# Altium PCB PCB1.PcbDoc (part 2 of 2)
Units mm, origin at the board's own origin, x right, y up, seen from the top; angles counter-clockwise.
Board outline 93.92 x 89.66 mm, 2 copper layers (Top Layer, Bottom Layer); 110 components, 45 nets, 506 pads, 98 vias.
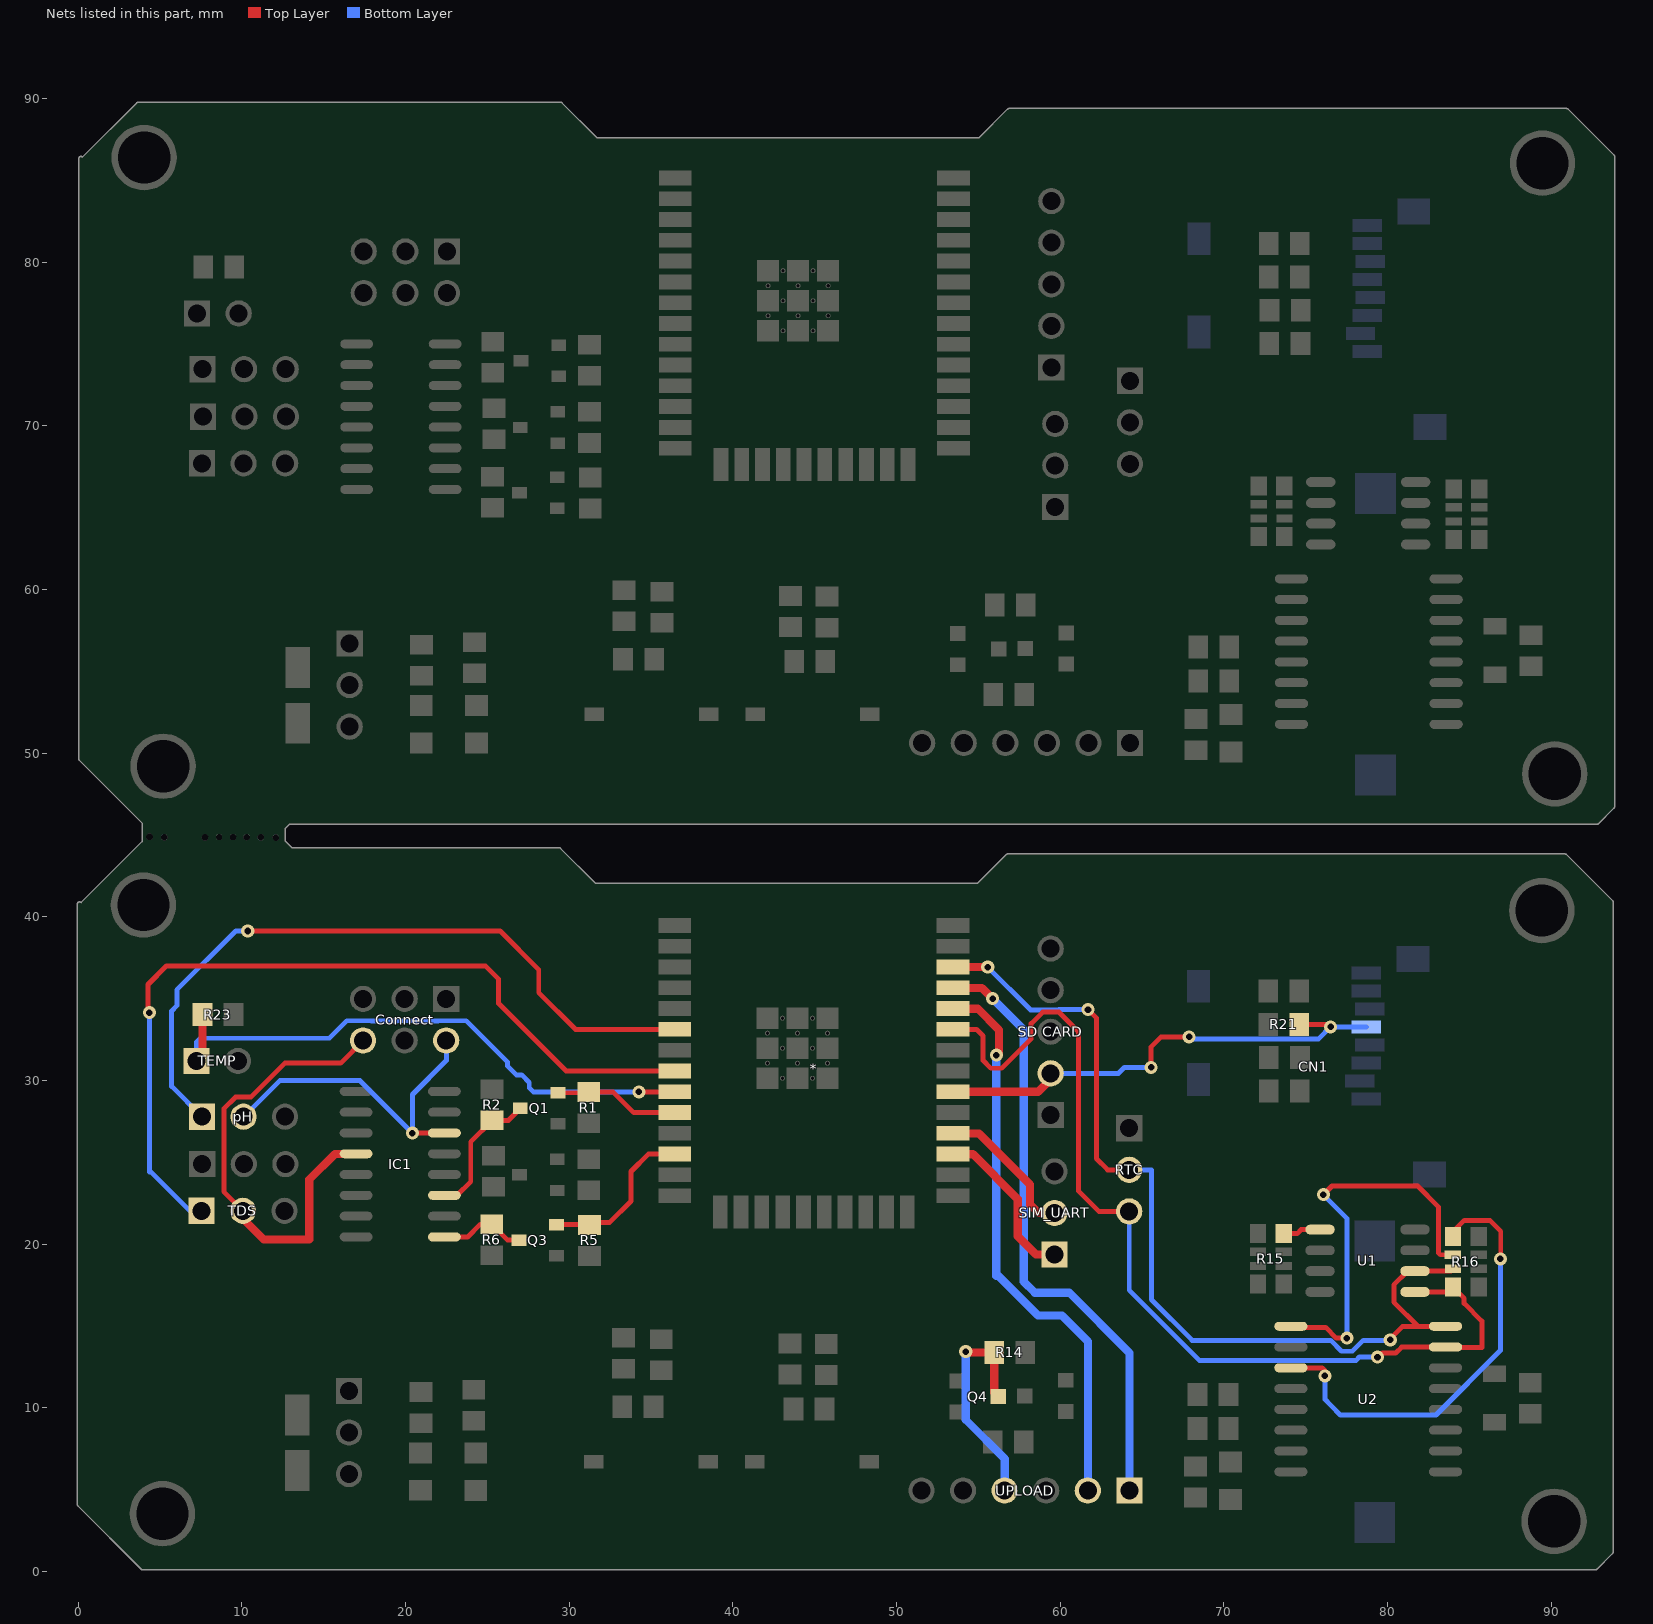
[diagram p2: the nets of this part, all layers, seen from the top]

## Via types
v1: diameter 0.8, hole 0.4, Top Layer to Bottom Layer, 92 vias
v2: diameter 1.27, hole 1.27, Top Layer to Bottom Layer, 4 vias
v3: diameter 1.27, hole 0.711, Top Layer to Bottom Layer, 2 vias

## Nets (pads, with @x,y where several pads share a name; then routed paths per layer and width w, separated by ;. In a path a pad name is that pad's centre, name@x,y a point inside that pad or via, vN(x,y) a via of type N, cw(c..) or ccw(c..) an arc to the next point about the centre after c; other vN are vias at no path point) (continued)
NetR15_4: R15.4@73.661,20.651 U1.1@75.879,20.891 | length 2.3
  Top Layer w0.3: R15.4@73.672,20.645 74.475,20.645 74.715,20.885 U1.1@75.89,20.885
NetR16_1: R16.1@83.999,20.469 U2.3@74.094,12.441 | length 27.7
  Top Layer w0.3: U2.3@74.105,12.435 75.995,12.435 76.18,12.25 v1(76.18,11.95) ; R16.1@84.01,20.463 84.01,20.77 84.687,21.447 86.252,21.447 86.92,20.779 86.92,19.12 v1(86.9,19.1)
  Bottom Layer w0.3: v1(76.18,11.95) 76.18,10.51 76.54,10.15 76.535,10.145 77.12,9.56 82.96,9.56 86.9,13.5 v1(86.9,19.1)
NetR16_2: R16.2@83.998,19.354 U2.1@74.094,14.981 | length 24.6
  Top Layer w0.3: U2.1@74.105,14.975 74.17,14.91 76.22,14.91 76.87,14.26 v1(77.52,14.26) ; v1(76.08,23.02) 76.61,23.55 81.84,23.55 83.11,22.28 83.11,21.219 83.106,21.215 83.106,19.468 83.226,19.348 R16.2@84.008,19.348
  Bottom Layer w0.3: v1(76.08,23.02) 77.52,21.58 v1(77.52,14.26)
pH_ADC: *.6@36.447,33.121 pH.1@7.559,27.786 | length 43.9
  Top Layer w0.3: v1(10.36,39.13) 25.78,39.13 28.14,36.77 28.14,35.37 30.395,33.115 *.6@36.458,33.115
  Bottom Layer w0.3: pH.1@7.57,27.78 5.708,29.642 5.708,34.244 6.036,34.572 6.036,35.536 9.63,39.13 v1(10.36,39.13)
pH_ON: *.10@36.447,28.041 Q1.2@29.319,29.256 R1.1@31.199,29.291 | length 7.7
  Top Layer w0.3: Q1.2@29.33,29.25 31.174,29.25 31.209,29.286 32.694,29.286 33.944,28.035 *.10@36.458,28.035
pH_ON_5V: IC1.11@22.379,22.981 Q1.3@27.019,28.306 R2.1@25.29,27.56 | length 8.3
  Top Layer w0.3: IC1.11@22.39,22.975 23.145,22.975 23.99,23.82 23.99,26.244 25.301,27.554 26.284,27.554 Q1.3@27.03,28.3
pH_POW: Connect.6@22.489,32.446 IC1.14@22.379,26.791 pH.2@10.099,27.786 | length 21
  Top Layer w0.3: v1(20.425,26.785) IC1.14@22.39,26.785
  Bottom Layer w0.3: pH.2@10.11,27.78 12.32,29.99 17.22,29.99 v1(20.425,26.785) 20.425,29.145 22.5,31.22 Connect.6@22.5,32.44
RTS: Q4.2@56.209,10.686 R14.2@55.965,13.387 UPLOAD.4@56.609,4.946 | length 14
  Top Layer w0.5: v1(54.23,13.43) 54.279,13.381 55.976,13.381 55.976,10.924 Q4.2@56.22,10.68
  Bottom Layer w0.5: v1(54.23,13.43) 54.23,9.27 56.62,6.88 UPLOAD.4@56.62,4.94
RXD0: *.34@53.447,34.391 UPLOAD.2@61.689,4.946 | length 34.9
  Top Layer w0.5: *.34@53.458,34.385 54.965,34.385 56.27,33.08 56.27,31.72 v1(56.1,31.55)
  Bottom Layer w0.5: v1(56.1,31.55) 56.1,18.05 56.165,18.115 ; 56.18,18.13 56.165,18.115 ; UPLOAD.2@61.7,4.94 61.7,14.05 60.12,15.63 58.65,15.63 56.165,18.115
SCK: "SD CARD.2"@59.419,30.436 *.30@53.447,29.311 CN1.5@78.71,33.27 R21.1@74.606,33.431 | length 30.3
  Top Layer w0.3: v1(65.56,30.8) 65.56,32.06 66.165,32.665 v1(67.875,32.665) ; R21.1@74.606,33.431 76.359,33.431 v1(76.52,33.27)
  Top Layer w0.5: *.30@53.458,29.305 58.655,29.305 59.57,30.22 59.215,30.575
  Bottom Layer w0.3: 59.419,30.436 63.566,30.436 63.93,30.8 v1(65.56,30.8) ; v1(67.875,32.665) 68,32.54 75.79,32.54 v1(76.52,33.27) CN1.5@78.71,33.27
SCL: *.36@53.447,36.931 R16.3@83.999,18.486 RTC.2@64.22,24.54 U1.6@81.679,18.351 U2.16@83.544,14.981 | length 57.8
  Top Layer w0.3: v1(61.7,34.33) 62.21,33.82 62.21,25.23 62.9,24.54 RTC.2@64.22,24.54 ; v1(80.17,14.15) 80.17,14.22 80.925,14.975 81.86,14.975 ; U2.16@83.555,14.975 81.86,14.975 ; R16.3@84.01,18.48 83.879,18.349 81.69,18.349 81.69,18.345 81.225,18.345 80.386,17.506 80.386,16.449 81.86,14.975
  Top Layer w0.5: *.36@53.458,36.925 v1(55.575,36.925)
  Bottom Layer w0.3: v1(55.575,36.925) 58.188,34.312 59.918,34.312 59.936,34.33 v1(61.7,34.33) v1@61.915,34.33 ; RTC.2@64.22,24.54 65.57,24.54 65.57,16.613 68.064,14.12 76.523,14.12 77.187,13.456 77.853,13.456 78.517,14.12 80.14,14.12 v1(80.17,14.15) 80.17,13.961 v1@80.149,13.94
SDA: *.33@53.447,33.121 R16.4@83.999,17.37 RTC.3@64.22,22 U1.5@81.679,17.081 U2.15@83.544,13.711 | length 60.7
  Top Layer w0.3: *.33@53.458,33.115 54.895,33.115 55.296,32.714 55.296,31.217 55.767,30.746 56.433,30.746 58.226,32.539 58.226,33.469 58.931,34.174 59.929,34.174 61.11,32.993 61.11,23.25 62.36,22 RTC.3@64.22,22 ; v1(79.39,13.1) 79.44,13.1 79.686,13.346 80.503,13.346 80.862,13.705 83.555,13.705 83.58,13.68 85.77,13.68 85.77,15.291 84.681,16.381 84.681,16.694 84.01,17.365 83.72,17.075 U1.5@81.69,17.075
  Bottom Layer w0.3: RTC.3@64.22,22 64.22,17.18 68.498,12.902 78.082,12.902 78.28,13.1 v1(79.39,13.1) v1@79.39,13.17
TDS_ADC: *.8@36.447,30.581 TDS.1@7.529,22.036 | length 51.9
  Top Layer w0.3: v1(4.35,34.14) 4.265,34.225 4.265,35.865 5.4,37 24.88,37 25.69,36.19 25.69,34.7 29.815,30.575 *.8@36.458,30.575
  Bottom Layer w0.3: v1(4.35,34.14) 4.35,24.39 4.405,24.445 6.82,22.03 TDS.1@7.54,22.03
TDS_ON: *.12@36.447,25.501 Q3.2@29.229,21.196 R5.1@31.249,21.171 | length 10.1
  Top Layer w0.3: Q3.2@29.24,21.19 31.235,21.19 31.259,21.166 31.566,21.166 31.71,21.31 32.46,21.31 33.78,22.63 33.78,24.44 34.835,25.495 *.12@36.458,25.495
TDS_ON_5V: IC1.9@22.379,20.441 Q3.3@26.929,20.246 R6.1@25.269,21.211 | length 5.3
  Top Layer w0.3: IC1.9@22.39,20.435 23.795,20.435 24.566,21.206 25.279,21.206 26.245,20.24 Q3.3@26.94,20.24
TDS_POW: Connect.4@17.409,32.446 IC1.4@16.979,25.521 TDS.2@10.069,22.036 | length 29.2
  Top Layer w0.3: TDS.2@10.08,22.03 8.906,23.204 8.906,28.279 9.611,28.984 10.554,28.984 12.63,31.06 16.04,31.06 Connect.4@17.42,32.44
  Top Layer w0.5: TDS.2@10.08,22.03 10.08,21.55 11.34,20.29 14.12,20.29 14.12,23.95 15.685,25.515 IC1.4@16.99,25.515
Temp_ADC: *.9@36.447,29.311 R23.1@7.594,34.019 TEMP.1@7.229,31.196 | length 36
  Top Layer w0.3: v1(34.265,29.305) *.9@36.458,29.305
  Top Layer w0.5: TEMP.1@7.229,31.196 7.594,31.561 R23.1@7.594,34.019
  Bottom Layer w0.3: TEMP.1@7.24,31.19 7.24,32.35 7.47,32.58 15.35,32.58 16.42,33.65 17.908,33.65 17.914,33.644 19.445,33.644 19.451,33.65 20.448,33.65 20.454,33.644 21.985,33.644 21.991,33.65 23.71,33.65 26.24,31.12 26.24,30.87 26.766,30.344 27.093,30.344 27.564,29.873 27.564,29.546 27.805,29.305 v1(34.265,29.305)
TXD0: *.35@53.447,35.661 UPLOAD.1@64.229,4.946 | length 37.4
  Top Layer w0.5: *.35@53.458,35.655 55.215,35.655 v1(55.87,35)
  Bottom Layer w0.5: v1(55.87,35) 57.77,33.1 57.77,17.71 58.45,17.03 60.56,17.03 64.24,13.35 UPLOAD.1@64.24,4.94
U2_RX: *.27@53.447,25.501 SIM_UART.1@59.659,19.366 | length 10.1
  Top Layer w0.5: *.27@53.458,25.495 54.665,25.495 57.406,22.754 57.406,20.484 58.53,19.36 SIM_UART.1@59.67,19.36
U2_TX: *.28@53.447,26.771 SIM_UART.2@59.659,21.906 | length 8.9
  Top Layer w0.5: *.28@53.458,26.765 55.035,26.765 58.16,23.64 58.16,22.43 58.69,21.9 SIM_UART.2@59.67,21.9
pads on no net: "SD CARD.1"@59.459,73.566 "SD CARD.2"@59.459,76.106 "SD CARD.3"@59.459,78.646 "SD CARD.4"@59.459,81.186 "SD CARD.5"@59.459,83.726 *.1@36.487,85.141 *.2@36.487,83.871 *.3@36.487,82.601 *.4 *.5 *.6@36.487,78.791 *.7@36.487,77.521 *.8@36.487,76.251 *.9@36.487,74.981 *.10@36.487,73.711 *.11@36.487,72.441 *.12@36.487,71.171 *.13 *.14 *.15@39.272,67.631 *.16 *.17 *.18 *.19 *.20 *.21 *.22 *.23 *.24@50.702,67.631 *.25@53.487,68.631 *.26 *.27@53.487,71.171 *.28@53.487,72.441 *.29@53.487,73.711 *.30@53.487,74.981 *.31@53.487,76.251 *.32 *.33@53.487,78.791 *.34@53.487,80.061 *.35@53.487,81.331 *.36@53.487,82.601 *.37@53.487,83.871 *.38@53.487,85.141 *.39 BOOT.1@41.369,52.376 BOOT.2@48.369,52.376 BT3.1@79.259,65.856 BT3.2@79.259,48.656 C1.1@13.419,55.226 C1.2@13.419,51.826 C2.1@45.645,55.599 C2.2@43.745,55.599 C3.1@33.294,55.732 C3.2@35.194,55.732 C4.1@68.429,56.476 C4.2@70.329,56.476 C5.1@68.429,54.416 C5.2@70.329,54.416 CN1.1 CN1.2@78.35,75.64 CN1.3@78.75,76.74 CN1.4@78.95,77.84 CN1.5@78.75,78.94 CN1.6@78.95,80.04 CN1.7@78.75,81.14 CN1.8 CN1.MH1 CN1.MH2 CN1.MH3 CN1.MH4 Connect.1@22.529,80.656 Connect.2@19.989,80.656 Connect.3@17.449,80.656 Connect.4@17.449,78.116 Connect.5@19.989,78.116 Connect.6@22.529,78.116 D1.1@86.579,54.791 D1.2@86.579,57.741 DO.1@7.619,70.556 DO.2@10.159,70.556 DO.3@12.699,70.556 EN.1@38.539,52.376 EN.2@31.539,52.376 IC1.1@17.019,75.001 IC1.2 IC1.3@17.019,72.461 IC1.4@17.019,71.191 IC1.5 IC1.6@17.019,68.651 IC1.7@17.019,67.381 IC1.8@17.019,66.111 IC1.9@22.419,66.111 IC1.10@22.419,67.381 IC1.11@22.419,68.651 IC1.12 IC1.13@22.419,71.191 IC1.14@22.419,72.461 IC1.15@22.419,73.731 IC1.16@22.419,75.001 L1.1@24.329,52.902 L1.2@24.329,50.616 L2.1@20.959,52.912 L2.2@20.959,50.626 L3.1@70.439,50.07 L3.2@70.439,52.356 pH.1@7.599,73.456 pH.2@10.139,73.456 pH.3@12.679,73.456 POW.1@16.589,56.696 POW.2@16.589,54.156 POW.3@16.589,51.616 Q1.1@29.359,73.026 Q1.2@29.359,74.926 Q1.3@27.059,73.976 Q2.1@29.309,68.946 Q2.2@29.309,70.846 Q2.3@27.009,69.896 Q3.1@29.269,64.966 Q3.2@29.269,66.866 Q3.3@26.969,65.916 Q4.1@53.749,57.306 Q4.2@56.249,56.356 Q4.3@53.749,55.406 Q5.1@60.379,55.446 Q5.2@57.879,56.396 Q5.3@60.379,57.346 R1.1@31.239,74.961 R1.2@31.239,73.061 R2.1@25.33,73.23 R2.2@25.33,75.13 R3.1@31.239,70.851 R3.2@31.239,68.951 R4.1@25.41,69.18 R4.2@25.41,71.08 R5.1@31.289,66.841 R5.2@31.289,64.941 R6.1@25.309,66.881 R6.2@25.309,64.981 R7.1@35.669,59.861 R7.2@35.669,57.961 R8.1@43.529,59.601 R8.2@43.529,57.701 R9.1@45.75,57.67 R9.2@45.75,59.57 R10.1@33.35,58.05 R10.2@33.35,59.95 R11.1@24.209,56.771 R11.2@24.209,54.871 R12.1@20.979,56.631 R12.2@20.979,54.731 R13.1@57.815,53.577 R13.2@55.915,53.577 R14.1@57.905,59.057 R14.2@56.005,59.057 R15.1 R15.2@73.703,64.337 R15.3@73.701,65.205 R15.4@73.701,66.321 R15.5@72.127,66.321 R15.6@72.125,65.205 R15.7@72.125,64.337 R15.8@72.127,63.222 R16.1@84.039,66.139 R16.2@84.038,65.024 R16.3@84.039,64.156 R16.4@84.039,63.04 R16.5@85.614,63.04 R16.6@85.616,64.156 R16.7@85.616,65.024 R16.8@85.614,66.139 R17.1@88.759,57.206 R17.2@88.759,55.306 R18.1@68.309,50.186 R18.2@68.309,52.086 R19.1@74.686,75.031 R19.2@72.786,75.031 R20.1@74.69,77.06 R20.2@72.79,77.06 R21.1@74.646,79.101 R21.2@72.746,79.101 R22.1@74.646,81.131 R22.2@72.746,81.131 R23.1@7.634,79.689 R23.2@9.534,79.689 RTC.1@64.26,72.75 RTC.2@64.26,70.21 RTC.3@64.26,67.67 SIM_UART.1@59.699,65.036 SIM_UART.2@59.699,67.576 SIM_UART.3@59.699,70.116 TDS.1@7.569,67.706 TDS.2@10.109,67.706 TDS.3@12.649,67.706 TEMP.1@7.269,76.866 TEMP.2@9.809,76.866 U1.1@75.919,66.561 U1.2@75.919,65.291 U1.3@75.919,64.021 U1.4@75.919,62.751 U1.5@81.719,62.751 U1.6@81.719,64.021 U1.7@81.719,65.291 U1.8@81.719,66.561 U2.1@74.134,60.651 U2.2@74.134,59.381 U2.3@74.134,58.111 U2.4 U2.5@74.134,55.571 U2.6@74.134,54.301 U2.7@74.134,53.031 U2.8@74.134,51.761 U2.9@83.584,51.761 U2.10@83.584,53.031 U2.11@83.584,54.301 U2.12@83.584,55.571 U2.13@83.584,56.841 U2.14@83.584,58.111 U2.15@83.584,59.381 U2.16@83.584,60.651 UPLOAD.1@64.269,50.616 UPLOAD.2@61.729,50.616 UPLOAD.3@59.189,50.616 UPLOAD.4@56.649,50.616 UPLOAD.5@54.109,50.616 UPLOAD.6
copper on no net: | length 1572.4
  Top Layer w0.3: v1(4.39,79.81) 4.305,79.895 4.305,81.535 5.44,82.67 24.92,82.67 25.73,81.86 25.73,80.37 29.855,76.245 36.498,76.245 ; v1(6.92,83.86) 25.26,83.86 27.05,82.07 27.05,80.51 30.044,77.515 36.498,77.515 ; 10.12,67.7 8.946,68.874 8.946,73.949 9.651,74.654 10.594,74.654 12.67,76.73 16.08,76.73 17.46,78.11 ; 10.17,70.55 11.29,71.67 11.29,72.823 11.486,73.019 11.486,73.949 13.627,76.09 19.29,76.09 ; v1(10.4,84.8) 25.82,84.8 28.18,82.44 28.18,81.04 30.435,78.785 36.498,78.785 ; 17.03,68.645 17.03,66.105 18.505,66.105 18.82,66.42 v1(18.82,67.74) ; 17.03,72.455 17.955,72.455 ; 17.03,74.995 18.205,74.995 18.55,74.65 18.55,73.05 17.955,72.455 ; 20,78.11 20,76.8 19.29,76.09 ; v1(20.465,72.455) 22.43,72.455 ; 22.43,66.105 23.835,66.105 24.606,66.876 25.319,66.876 26.285,65.91 26.98,65.91 ; 22.43,67.375 23.415,67.375 25.214,69.174 25.421,69.174 ; 22.43,68.645 23.185,68.645 24.03,69.49 24.03,71.914 25.341,73.224 26.324,73.224 27.07,73.97 ; 22.43,71.185 20.375,71.185 19.105,72.455 17.955,72.455 ; 22.43,73.725 20.905,73.725 20.905,74.475 19.29,76.09 ; 22.43,74.995 22.435,75 23.88,75 24.004,75.124 25.341,75.124 25.426,75.21 v1(26.8,75.21) ; 24.219,56.766 27.426,56.766 v1(27.82,57.16) ; 25.319,64.976 26.275,64.02 v1(26.89,64.02) ; 25.421,71.074 26.096,71.75 v1(26.89,71.75) ; 29.28,66.86 31.275,66.86 31.299,66.836 31.606,66.836 31.75,66.98 32.5,66.98 33.82,68.3 33.82,70.11 34.875,71.165 36.498,71.165 ; 29.32,70.84 29.326,70.846 31.249,70.846 32.716,70.846 34.29,72.42 36.483,72.42 36.498,72.435 ; 29.37,74.92 31.214,74.92 31.249,74.956 32.734,74.956 33.984,73.705 36.498,73.705 ; 31.249,68.946 31.244,68.94 28.71,68.94 28.21,68.44 ; 31.249,73.056 31.214,73.02 28.37,73.02 28.21,72.86 28.21,68.44 ; 31.299,64.936 31.275,64.96 29.28,64.96 29.09,64.96 28.21,65.84 28.21,68.44 ; v1(33.37,85.27) 33.504,85.135 39.56,85.135 ; v1(34.305,74.975) 36.498,74.975 ; 35.204,55.727 43.622,55.727 43.756,55.593 ; 35.59,59.944 35.645,59.89 35.679,59.89 v1(37.48,59.89) ; 35.679,57.956 43.279,57.956 43.539,57.696 ; 36.498,82.595 36.563,82.53 38.17,82.53 38.17,68.24 37.32,67.39 37.32,66.32 ; 39.283,67.625 39.56,67.902 39.56,85.135 ; 45.761,59.564 47.164,59.564 ; v1(49.74,64.66) 50.713,65.633 50.713,67.625 ; v1(49.97,55.4) 53.76,55.4 ; 53.498,68.625 53.498,65.898 47.164,59.564 ; 53.498,78.785 54.935,78.785 55.336,78.384 55.336,76.887 55.807,76.416 56.473,76.416 58.266,78.209 58.266,79.139 58.971,79.844 59.969,79.844 61.15,78.663 61.15,68.92 62.4,67.67 64.26,67.67 ; 53.498,85.135 39.56,85.135 ; 60.39,57.34 60.18,57.55 60.18,59.28 59.06,60.4 53.11,60.4 52.274,59.564 47.164,59.564 ; 61.61,83.72 62.91,82.42 62.91,74.1 64.26,72.75 ; v1(61.74,80) 62.25,79.49 62.25,70.9 62.94,70.21 64.26,70.21 ; v1(64.45,78.65) 65.65,79.85 v1(66.68,79.85) ; v1(65.6,76.47) 65.6,77.73 66.205,78.335 v1(67.915,78.335) ; 68.32,50.18 70.334,50.18 70.45,50.064 ; 68.32,52.08 68.32,54.29 68.44,54.41 68.44,57.75 70.065,59.375 71.31,59.375 ; 70.34,56.47 70.34,54.41 ; 70.45,52.35 70.45,54.3 70.34,54.41 ; 72.746,81.131 72.746,79.101 72.746,73.584 v1(73.1,73.23) ; 73.712,65.199 75.844,65.199 75.93,65.285 ; 73.712,66.315 74.515,66.315 74.755,66.555 75.93,66.555 ; 73.714,64.331 74.639,64.331 74.93,64.04 75.905,64.04 75.93,64.015 ; 74.145,58.105 76.035,58.105 76.22,57.92 v1(76.22,57.62) ; 74.145,59.375 71.31,59.375 ; 74.145,60.645 74.21,60.58 76.26,60.58 76.91,59.93 v1(77.56,59.93) ; 74.646,79.101 76.399,79.101 v1(76.56,78.94) ; 74.646,81.131 74.696,81.08 v1(76.57,81.08) ; 74.686,75.031 v1(76.421,75.031) ; 74.69,77.06 75,77.37 75.28,77.09 v1(76.53,77.09) ; 75.93,62.745 76.01,62.745 ; v1(76.12,68.69) 76.65,69.22 81.88,69.22 83.15,67.95 83.15,66.889 83.146,66.885 83.146,65.138 83.266,65.018 84.048,65.018 ; v1(76.79,48.73) 75.51,48.73 74.145,50.095 74.145,54.295 ; v1(79.43,58.77) 79.48,58.77 79.726,59.016 80.543,59.016 80.902,59.375 83.595,59.375 83.62,59.35 85.81,59.35 85.81,60.961 84.721,62.051 84.721,62.364 84.05,63.035 83.76,62.745 81.73,62.745 ; v1(80.21,59.82) 80.21,59.89 80.965,60.645 81.9,60.645 ; v1(81.425,68.18) 80.765,67.52 ; v1(81.445,58.105) 83.595,58.105 86.22,58.105 86.59,57.735 ; 81.73,65.285 80.105,65.285 77.565,62.745 76.01,62.745 ; 81.73,66.555 80.765,67.52 ; v1(83.09,48.69) 83.595,49.195 83.595,54.301 83.595,56.835 ; 83.595,60.645 81.9,60.645 ; 84.05,64.15 83.919,64.019 81.73,64.019 81.73,64.015 81.265,64.015 80.426,63.176 80.426,62.119 81.9,60.645 ; 84.05,66.133 84.05,66.44 84.727,67.117 86.292,67.117 86.96,66.449 86.96,64.79 v1(86.94,64.77) ; 85.625,66.133 85.625,65.019 85.626,65.018 85.626,64.15 85.625,64.148 85.625,63.035 87.705,63.035 ; v1(86.55,68.18) 86.55,68.04 87.744,66.846 87.744,64.437 87.705,64.398 87.705,63.035 ; 86.59,54.785 88.255,54.785 88.77,55.3 ; 88.77,57.2 88.54,57.43 88.54,62.2 87.705,63.035 ; 70.34,54.41 74.03,54.41 74.145,54.295 ; 71.31,59.375 71.31,62.47 72.056,63.216 72.137,63.216 72.137,64.33 72.136,64.331 72.136,65.199 72.137,65.201 72.137,67.067 72.59,67.52 80.765,67.52 ; 74.145,54.295 74.145,55.565 77.075,55.565 78.5,56.99 78.5,58.23 78.391,58.339 78.391,60.244 76.01,62.625 76.01,62.745
  Top Layer w0.5: 7.269,76.866 7.634,77.231 7.634,79.689 ; 7.8,46.636 10.736,46.636 14.38,50.28 17.93,50.28 ; 9.534,79.689 13.159,79.689 v1(14.36,80.89) 14.6,80.65 22.54,80.65 ; 10.12,67.7 10.12,67.22 11.38,65.96 14.16,65.96 14.16,69.62 15.725,71.185 17.03,71.185 ; 12.66,67.7 12.71,67.75 12.71,70.55 12.69,70.57 12.69,73.45 ; 13.43,55.22 14.24,55.22 15.31,54.15 17.74,54.15 20.216,56.626 20.989,56.626 20.989,59.609 22.57,61.19 22.57,62.38 ; 16.6,56.69 16.6,57.35 v1(20.85,61.6) ; 17.03,66.105 16.215,66.105 11.83,61.72 11.83,60.97 ; v1(19.15,64.03) 20.68,64.03 20.8,64.15 ; 20.375,71.185 20.375,64.575 20.8,64.15 ; 20.93,50.58 20.63,50.28 17.93,50.28 ; 20.97,50.62 24.33,50.62 24.34,50.61 36.5,50.61 38.26,52.37 38.55,52.37 ; 20.97,52.906 20.989,52.925 20.989,54.726 ; 24.219,54.866 24.219,53.017 24.34,52.896 ; 25.421,69.174 26.304,69.174 27.02,69.89 ; 28.21,72.86 v1(28.21,76.27) ; 29.28,64.96 29.28,63.66 28,62.38 ; v1(30.1,57.24) 28,59.34 28,62.38 ; 31.55,52.37 32.16,52.37 33.304,53.514 33.304,55.727 33.361,55.783 33.361,58.044 ; v1(32.115,83.865) 36.498,83.865 ; 33.361,59.944 35.59,59.944 ; v1(33.37,85.27) 27.92,85.27 27.2,85.99 11.03,85.99 7.69,85.99 3.486,81.786 3.486,67.874 10.39,60.97 11.83,60.97 ; 35.204,55.727 35.204,54.666 35.95,53.92 37,53.92 38.55,52.37 ; 35.679,59.89 35.679,63.999 37.32,65.64 37.32,66.32 ; v1(39.7,57.68) v1@39.7,57.95 ; 41.38,52.37 38.55,52.37 ; 43.539,59.596 45.73,59.596 45.761,59.564 ; 43.756,55.593 43.756,53.866 42.26,52.37 45.74,52.37 48.99,49.12 52.63,49.12 54.12,50.61 ; 45.761,57.664 45.656,57.559 45.656,54.024 47.31,52.37 48.38,52.37 ; 53.498,71.165 54.705,71.165 57.446,68.424 57.446,66.154 58.57,65.03 59.71,65.03 ; 53.498,72.435 55.074,72.435 58.2,69.31 58.2,68.1 58.73,67.57 59.71,67.57 ; 53.498,73.705 59.255,73.705 59.61,73.35 ; 53.498,74.975 58.695,74.975 59.61,75.89 59.255,76.245 ; 53.498,76.245 55.053,76.245 55.569,75.729 56.711,75.729 59.47,78.488 59.47,78.64 ; 53.498,80.055 55.005,80.055 56.31,78.75 56.31,77.39 v1(56.14,77.22) ; 53.498,81.325 55.255,81.325 v1(55.91,80.67) ; 53.498,82.595 v1(55.615,82.595) ; 53.498,83.865 56.245,83.865 59.14,80.97 59.61,80.97 ; 53.498,85.135 57.175,85.135 58.8,83.51 59.61,83.51 ; 53.76,57.3 54.09,57.3 55.18,56.21 55.18,54.316 55.926,53.571 ; v1(54.27,59.1) 54.319,59.051 56.016,59.051 56.016,56.594 56.26,56.35 ; 57.89,56.39 57.89,53.635 57.826,53.571 57.826,51.984 59.2,50.61 ; 57.916,59.051 57.916,58.134 59.32,56.73 59.32,55.94 59.82,55.44 60.39,55.44 ; 59.47,83.72 61.61,83.72 ; v3(66.48,48.32) 66.48,51.93 ; 68.32,52.08 66.63,52.08 66.48,51.93 ; v1(73.1,73.23) 71.53,73.23 66.48,68.18 66.48,51.93 ; 11.83,60.97 11.83,53.42 13.43,51.82 16.39,51.82 17.93,50.28 ; 20.8,64.15 22.57,62.38 ; 22.57,62.38 22.57,62.45 28,62.45 28,62.38
  Bottom Layer w0.3: v1(4.39,79.81) 4.39,70.06 4.445,70.115 6.86,67.7 7.58,67.7 ; v1(6.92,83.86) 6.61,83.86 5.522,82.772 5.522,80.471 5.194,80.143 5.194,70.636 5.28,70.55 7.63,70.55 ; 7.28,76.86 7.28,78.02 7.51,78.25 15.39,78.25 16.46,79.32 17.948,79.32 17.954,79.314 19.485,79.314 19.491,79.32 20.488,79.32 20.494,79.314 22.025,79.314 22.031,79.32 23.75,79.32 26.28,76.79 26.28,76.54 26.806,76.014 27.133,76.014 27.604,75.543 27.604,75.216 27.845,74.975 v1(34.305,74.975) ; 7.61,73.45 5.748,75.312 5.748,79.914 6.076,80.242 6.076,81.206 9.67,84.8 v1(10.4,84.8) ; 9.82,76.86 9.82,74.823 8.946,73.949 8.946,72.947 8.95,72.943 8.95,72.88 9.7,72.13 11.37,72.13 12.69,73.45 ; 10.15,73.45 12.36,75.66 17.26,75.66 v1(20.465,72.455) 20.465,74.815 22.54,76.89 22.54,78.11 ; 12.66,67.7 18.78,67.7 v1(18.82,67.74) ; v1(26.8,75.21) 26.89,75.21 v1(26.89,71.75) v1(26.89,64.02) ; v1(27.82,57.16) 35.32,64.66 v1(49.74,64.66) ; v1(37.48,59.89) 45.48,59.89 v1(49.97,55.4) ; v1(55.615,82.595) 58.228,79.982 59.958,79.982 59.976,80 v1(61.74,80) v1@61.955,80 ; 59.459,73.566 61.246,73.566 62.01,74.33 67.609,74.33 67.613,74.326 75.716,74.326 v1(76.421,75.031) 76.94,75.55 78.26,75.55 78.35,75.64 ; 59.459,76.106 63.606,76.106 63.97,76.47 v1(65.6,76.47) ; 59.459,78.646 59.464,78.65 v1(64.45,78.65) ; 59.459,81.186 63.564,81.186 67.616,77.134 76.486,77.134 v1(76.53,77.09) 77.18,77.09 77.53,76.74 78.75,76.74 ; 59.699,70.116 62.334,72.75 64.26,72.75 64.819,72.191 80.171,72.191 81.46,73.48 81.46,78.89 80.31,80.04 ; 64.26,67.67 64.26,62.85 68.538,58.572 78.122,58.572 78.32,58.77 v1(79.43,58.77) v1@79.43,58.84 ; 64.26,70.21 65.61,70.21 65.61,62.283 68.104,59.79 76.563,59.79 77.227,59.126 77.893,59.126 78.557,59.79 80.18,59.79 v1(80.21,59.82) 80.21,59.631 v1@80.189,59.61 ; v1(66.68,79.85) 70.11,79.85 71.34,81.08 v1(76.57,81.08) 78.69,81.08 78.75,81.14 ; v1(67.915,78.335) 68.04,78.21 75.83,78.21 v1(76.56,78.94) 78.75,78.94 ; v1(73.1,73.23) 79.97,73.23 80.29,73.55 80.29,77.84 78.95,77.84 ; v1(76.12,68.69) 77.56,67.25 v1(77.56,59.93) ; v1(76.22,57.62) 76.22,56.18 76.58,55.82 76.575,55.815 77.16,55.23 83,55.23 86.94,59.17 v1(86.94,64.77) ; v1(76.79,48.73) 76.83,48.69 v1(83.09,48.69) ; 79.35,65.89 79.35,62.46 81.269,60.541 81.269,58.281 v1(81.445,58.105) ; v1(81.425,68.18) v1(86.55,68.18)
  Bottom Layer w0.5: 8.51,49.55 8.51,50.16 8.51,64.03 ; v1(14.36,80.89) 14.36,84 12.62,85.74 7.44,85.74 6.534,84.834 3.486,81.786 3.486,69.054 8.51,64.03 ; v1(19.15,64.03) 8.51,64.03 ; v1(20.85,61.6) 23.27,64.02 v1(26.89,64.02) ; v1(28.21,76.27) 28.21,79.96 v1(32.115,83.865) ; v1(30.1,57.24) 39.26,57.24 v1(39.7,57.68) 39.7,49.91 42.05,47.56 65.72,47.56 v3(66.48,48.32) ; v1(54.27,59.1) 54.27,54.94 56.66,52.55 56.66,50.61 ; v1(55.91,80.67) 57.81,78.77 57.81,63.38 58.49,62.7 60.6,62.7 64.28,59.02 64.28,50.61 ; v1(56.14,77.22) 56.14,63.72 56.205,63.785 ; 56.22,63.8 56.205,63.785 ; 61.74,50.61 61.74,59.72 60.16,61.3 58.69,61.3 56.205,63.785 ; 78.95,80.04 80.31,80.04 86.83,80.04 90.64,76.23 90.64,53.23 86.1,48.69 v1(83.09,48.69)
  other v2: 79.219,7.56 79.225,15.165 79.259,53.23 79.265,60.835

## Polygon pours and split planes (outlines as drawn)
no net on Top Layer "Bottom Layer-No Net" (solid, pour order 0): 5.08,44.16 1.15,40.23 1.15,4.67 4.93,0.89 92.25,0.89 93.14,1.78 93.14,40.09 90.24,42.99 57.03,42.99 55.1,41.06 30.98,41.06 28.3,43.74 4.8,43.74
no net on Top Layer "Bottom Layer-No Net" (solid, pour order 6): 0.83,85.64 0.83,50.78 5.3,46.31 5.37,46.38 91.78,46.38 93,47.6 93,85.72 89.89,88.83 57.61,88.83 55.18,86.4 31.83,86.4 28.95,89.28 28.88,89.21 4.47,89.21
no net on Bottom Layer "Bottom Layer-No Net" (solid, pour order 2): 0.98,40.17 0.98,4.7 4.93,0.75 92.16,0.75 93.3,1.89 93.3,40.17 90.27,43.2 56.77,43.2 56.77,43.12 54.88,41.23 31.15,41.23 28.5,43.88 4.4,43.88
no net on Bottom Layer "Bottom Layer-No Net" (solid, pour order 4): 0.83,85.87 0.83,50.56 4.86,46.53 91.56,46.53 91.56,46.61 92.77,47.82 92.77,85.8 89.74,88.83 57.68,88.83 55.33,86.48 31.23,86.48 31.23,86.85 28.87,89.21 3.79,89.21

## Keep-outs
Keep-Out Layer:
  lines w0.254: 3.98,45.9 0.12,49.76 0.12,86.26 3.62,89.76 13.05,89.76 29.43,89.76 31.6,87.59 55.04,87.59 56.83,89.38 90.89,89.38 93.7,86.57 93.7,46.85 92.75,45.9 12.95,45.9 12.59,45.54 12.59,45.19 ; 4.03,45.78 4.03,44.54 3.58,44.09 0.08,40.59 0.08,4.09 3.94,0.23 92.71,0.23 93.66,1.18 93.66,40.9 90.85,43.71 56.79,43.71 55,41.92 31.56,41.92 29.39,44.09 13.01,44.09 12.53,44.57 12.53,45.45

## Other copper
Top Layer:
  region net GND: 6.95,45.83 7.45,46.33 8.27,46.33 8.27,46.88 8.09,47.06 8,46.97 6.78,46.97 6.78,46.27 7.13,45.92
Bottom Layer:
  region net 3.3V: 7.921,50.799 8.7,50.02 8.7,48.2 8.12,48.2 7.74,47.82 7.51,48.05 7.51,49.81

## Silkscreen, mask and mechanical layers (free items; w line width, h text height)
Top Overlay:
  text "GND" at 55.88,83.76 h0.7
  text "MOSI" at 55.57,81.21 h0.7
  text "3.3V" at 24.48,80.23 h0.7
  text "MISO" at 55.23,78.57 h0.7
  text "+" at 24.46,77.46 h0.7
  text "SCK" at 55.39,75.44 h0.7
  text "CS" at 55.66,73.15 h0.7
  text "SCL" at 66.23,69.72 h0.7
  text "SDA" at 66.28,67.34 h0.7
  text "TX" at 56.35,66.95 h0.7
  text "A" at 7.29,65.15 h0.7
  text "GND" at 11.95,65.16 h0.7
  text "+" at 9.82,65.04 h0.7
  text "RX" at 56.36,64.84 h0.7
  text "GND" at 55.84,38.09 h0.7
  text "MOSI" at 55.53,35.54 h0.7
  text "3.3V" at 24.44,34.56 h0.7
  text "MISO" at 55.19,32.9 h0.7
  text "+" at 24.42,31.79 h0.7
  text "SCK" at 55.35,29.77 h0.7
  text "CS" at 55.62,27.48 h0.7
  text "SCL" at 66.19,24.05 h0.7
  text "SDA" at 66.24,21.67 h0.7
  text "TX" at 56.31,21.28 h0.7
  text "A" at 7.25,19.48 h0.7
  text "GND" at 11.91,19.49 h0.7
  text "+" at 9.78,19.37 h0.7
  text "RX" at 56.32,19.17 h0.7

## Text inside footprints (layer, text, board x,y; h text height)
*: Mechanical 13 "ANTENNA" at 38.987,88.881 h0.7
*: Mechanical 13 "ANTENNA" at 38.947,43.211 h0.7